# EAGLE board hello5 (EAGLE 4.15)
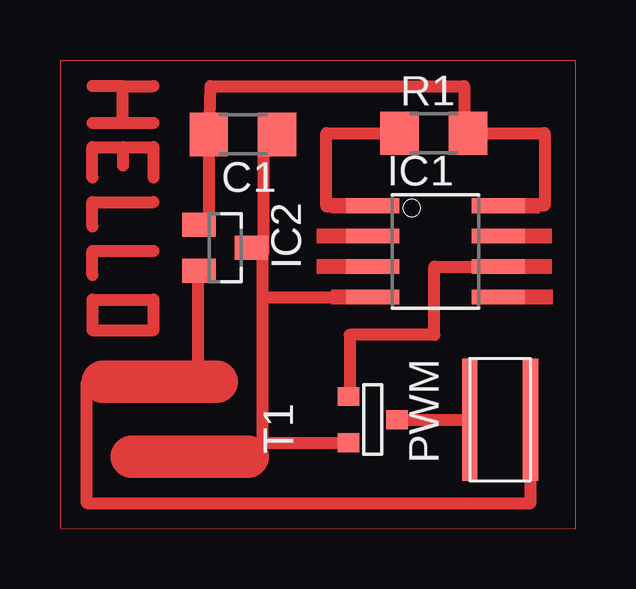
[diagram p0: board, top side]

No outline drawn. Coordinates in mm, seen from the top.
Copper layers (1*16): Top 0.035mm / dielectric 1.5mm / Bottom 0.035mm
Design rules "default": minimum track width 10mil, minimum drill 24mil, track to track 8mil, track to pad 8mil, pad to pad 8mil, via to via 8mil, smd to smd 8mil, copper to edge 40mil, drill to drill 8mil, minimum pad ring 10mil, minimum via ring 8mil, stop-mask expansion 4mil, vias tented up to drill 0mil, thermal gap 10mil

## Footprints (pad centres in the part's own frame; a part is rotated, then mirrored left to right if it is on the bottom)
1206 = smd 1.6 x 1.803: 1 -1.422,0; 2 1.422,0
SO08 = smd 0.61 x 2.21: 1 -1.905,-2.616; 2 -0.635,-2.616; 3 0.635,-2.616; 4 1.905,-2.616; 5 1.905,2.616; 6 0.635,2.616; 7 -0.635,2.616; 8 -1.905,2.616
SOT23 = smd 1 x 1.4: 1 -0.95,-1.1; 2 0.95,-1.1; 3 0,1.1
SMT_PINS_2 = smd 5.08 x 0.635: 1 0,0; 2 0,2.54
SOT-23 = smd 0.787 x 0.889: 1 0.025,-1.016; 2 -0.94,1.016; 3 0.991,1.016

## Placement (x,y rotation side)
C1  3.3uF  [1206]  7.59,16.36 180 top
IC1  [SO08]  15.62,11.48 270 top
IC2  5V  [SOT23]  6.86,11.63 270 top
PWM  2_PIN_HEADERHEADER  [SMT_PINS_2]  17.04,4.47 270 top
R1  10k  [1206]  15.54,16.41 0 top
T1  [SOT-23]  13,4.45 90 top

## Library data of the parts
C1 IC1 IC2 PWM R1 T1 = ng

## Nets
N$1: IC1.6 T1.3
N$2: IC1.1 R1.1
N$3: C1.2 IC1.8 IC2.1 R1.2
N$6: C1.1 IC1.4 IC2.3 T1.2
N$8: PWM.1 T1.1
N$9: IC2.2 PWM.2

## Tracks (layer width: path | path; a pad name or v marks a point on that pad's centre or on a via)
N$1
  Top 0.406: 12.04,5.44 T1.3
  Top 0.508: IC1.6 15.57,10.85 15.57,8 12.04,8 12.04,5.44
N$2
  Top 0.406: 13.11,13.41 13.11,13.39 IC1.1 | 11.89,13.36 11.89,13.41
  Top 0.508: R1.1 11.07,16.41 11.07,13.36 11.89,13.36 | 11.89,13.41 13.11,13.41
N$3
  Top 0.406: 6.25,16.43 6.2,16.36 C1.2 | 16.82,16.41 R1.2 | IC1.8 17.96,13.39
  Top 0.508: IC2.1 6.2,12.58 6.2,16.36 6.25,18.36 16.82,18.36 16.82,16.41 | R1.2 20.17,16.41 20.17,13.39 IC1.8
N$6
  Top 0.406: IC2.3 8.43,11.63 8.43,11.43 8.46,11.46 | 8.46,16.36 C1.1 | 8.43,9.55 8.48,9.55 8.48,9.58 | IC1.4 12.12,9.58 12.12,9.68 | 8.43,3.5 7.8,3.5 7.8,2.92 | T1.2 11.91,3.5 11.91,3.48
  Top 0.508: 8.43,11.43 8.43,9.55 8.43,3.5 11.91,3.5 | 8.46,11.46 8.46,16.36 | 8.48,9.58 12.12,9.58
  Top 1.778: 2.97,2.92 7.8,2.92
N$8  (1 unrouted)
  Top 0.406: 17.09,4.47 17.09,4.45
  Top 0.508: 17.07,4.47 PWM.1 T1.1
N$9
  Top 0.406: 5.74,10.79 5.74,10.68 IC2.2 | 6.5,6.04 5.74,6.02 | 1.09,6.02 1.75,6.04
  Top 0.508: 5.74,6.02 5.74,10.68 | 1.09,6.02 1.09,0.99 19.58,0.99 PWM.2 19.58,4.57
  Top 1.778: 1.75,6.04 6.5,6.04
N$10
  Top 0: 0,-0.05 0,19.46 21.46,19.46 21.46,-0.08 0,-0.05
N$17
  Top 0.508: 2.59,18.36 1.32,18.36 | 2.59,18.36 3.86,18.36 | 2.59,16.84 2.59,18.36
N$19
  Top 0.508: 1.32,16.84 3.86,16.84
N$20
  Top 0.508: 2.59,15.82 3.86,15.82 3.86,14.55 | 2.59,15.82 1.32,15.82 1.32,14.55 | 2.59,15.82 2.59,15.06
N$21
  Top 0.508: 3.86,13.54 1.32,13.54 1.32,12.52
N$22
  Top 0.508: 3.86,11.51 1.32,11.51 1.32,10.49
N$23
  Top 0.508: 1.32,9.47 1.32,8.2 3.86,8.2 3.86,9.47 1.32,9.47
(copper drawn outside any net)
  shapes: Top area x13